# EAGLE board Shield1 (EAGLE 6.5.0)
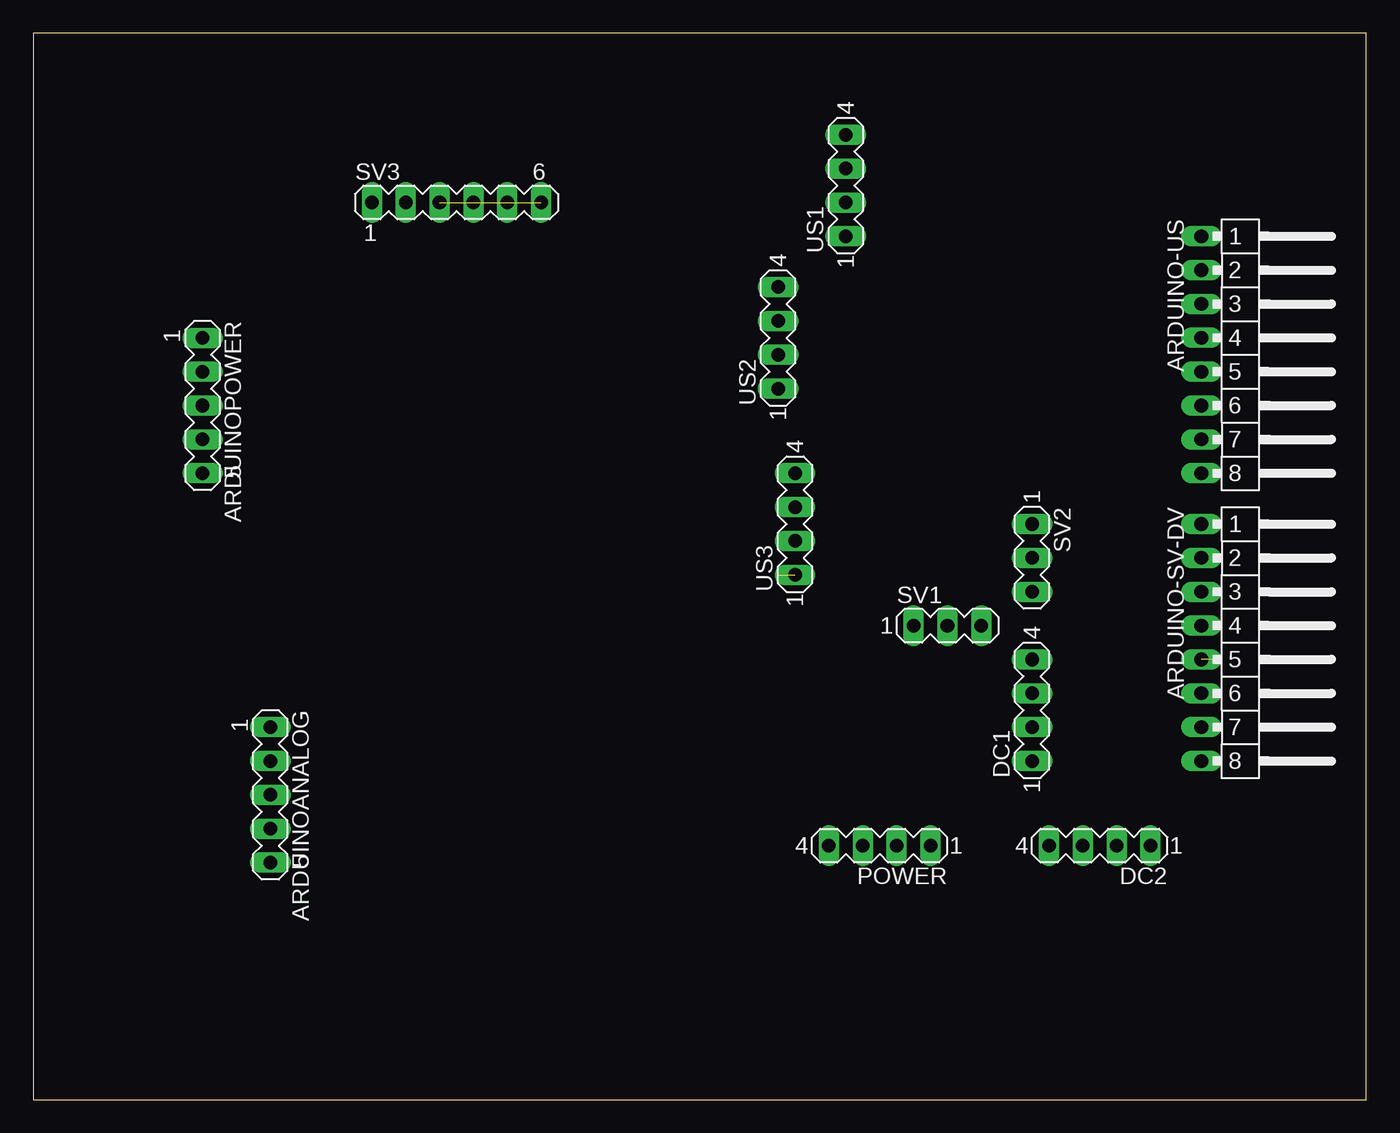
[diagram p0: board, top side]
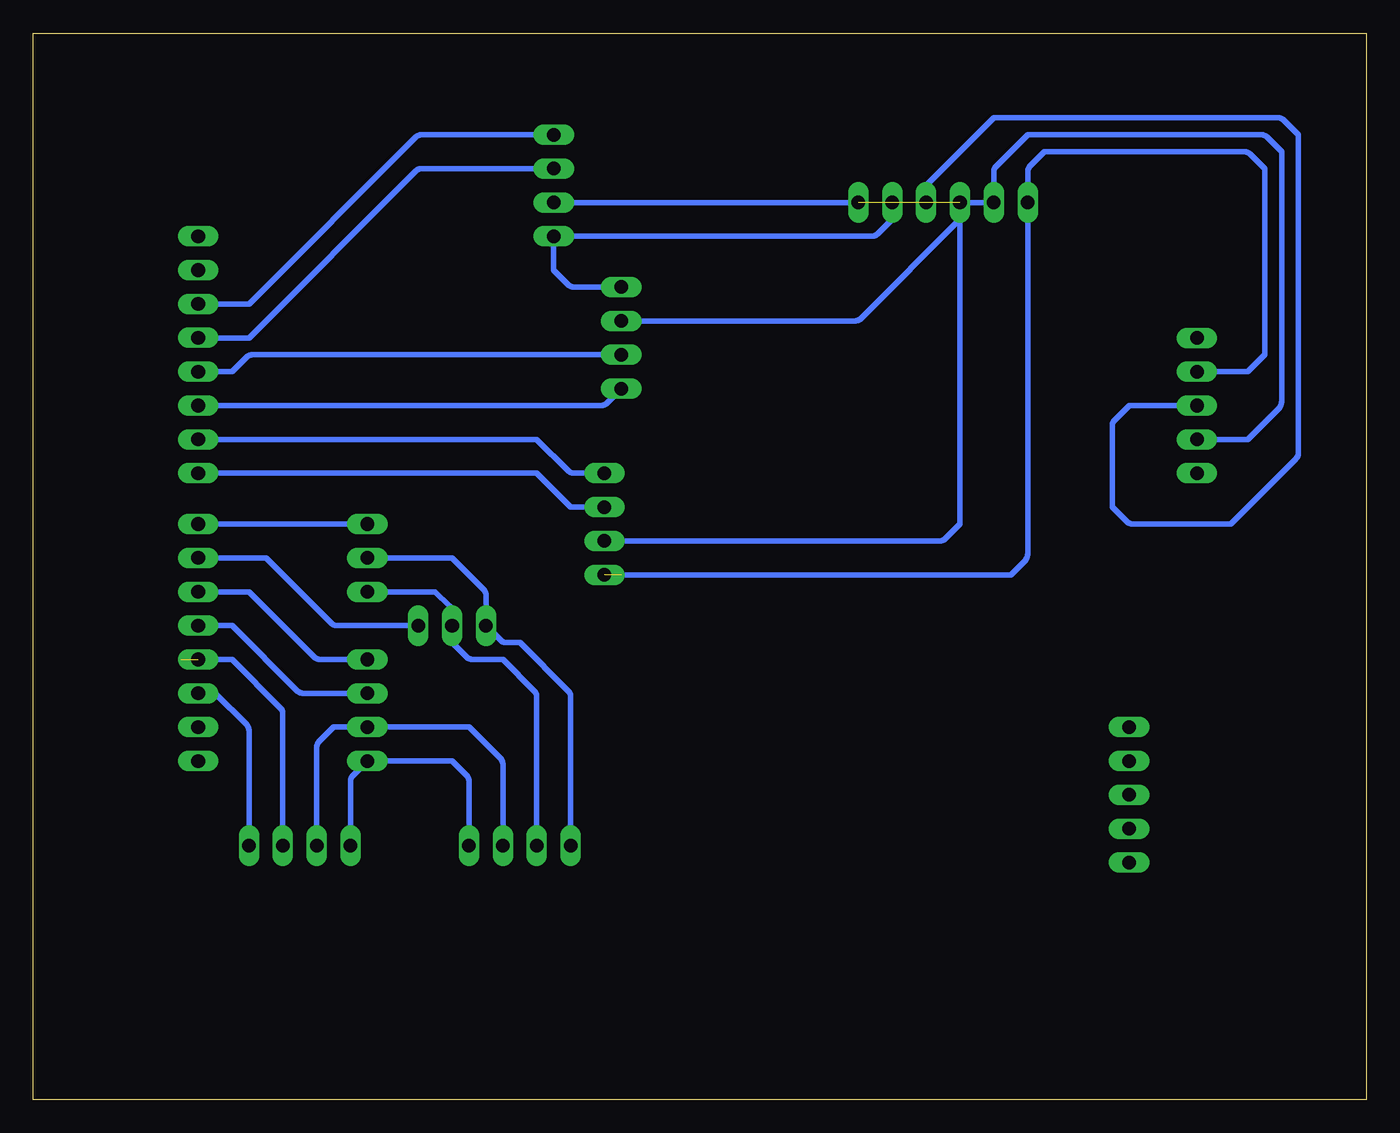
[diagram p1: board, bottom side, seen from below]

Size 100 x 80 mm. Coordinates in mm from the lower left corner, seen from the top.
Outline: 0,0 100,0 100,80 0,80 0,0
Copper layers (1*16): Top 0.035mm / dielectric 1.5mm / Bottom 0.035mm
Design rules "default": minimum track width 10mil, minimum drill 24mil, track to track 8mil, track to pad 8mil, pad to pad 8mil, via to via 8mil, smd to smd 8mil, copper to edge 40mil, drill to drill 8mil, minimum pad ring 10mil, minimum via ring 8mil, stop-mask expansion 4mil, vias tented up to drill 0mil, thermal gap 10mil

## Footprints (pad centres in the part's own frame; a part is rotated, then mirrored left to right if it is on the bottom)
MA08-1W = drill 1.016 long: 1 -8.89,0; 2 -6.35,0; 3 -3.81,0; 4 -1.27,0; 5 1.27,0; 6 3.81,0; 7 6.35,0; 8 8.89,0
MA05-1 = drill 1.016 long: 1 -5.08,0; 2 -2.54,0; 3 0,0; 4 2.54,0; 5 5.08,0
MA04-1 = drill 1.016 long: 1 -3.81,0; 2 -1.27,0; 3 1.27,0; 4 3.81,0
MA03-1 = drill 1.016 long: 1 -2.54,0; 2 0,0; 3 2.54,0
MA06-1 = drill 1.016 long: 1 -6.35,0; 2 -3.81,0; 3 -1.27,0; 4 1.27,0; 5 3.81,0; 6 6.35,0

## Placement (x,y rotation side)
ARDUINO-SV-DV  [MA08-1W]  87.63,34.29 270 top
ARDUINO-US  [MA08-1W]  87.63,55.88 270 top
ARDUINOANALOG  [MA05-1]  17.78,22.86 270 top
ARDUINOPOWER  [MA05-1]  12.7,52.07 270 top
DC1  [MA04-1]  74.93,29.21 90 top
DC2  [MA04-1]  80.01,19.05 180 top
POWER  [MA04-1]  63.5,19.05 180 top
SV1  [MA03-1]  68.58,35.56 0 top
SV2  [MA03-1]  74.93,40.64 270 top
SV3  [MA06-1]  31.75,67.31 0 top
US1  [MA04-1]  60.96,68.58 90 top
US2  [MA04-1]  55.88,57.15 90 top
US3  [MA04-1]  57.15,43.18 90 top

## Library data of the parts
ARDUINO-SV-DV ARDUINO-US ARDUINOANALOG ARDUINOPOWER DC1 DC2 POWER SV1-SV3 US1-US3 = con-lstb; OC_FARNELL: unknown; OC_NEWARK: unknown

## Nets
5V2: POWER.3 SV1.2 SV2.3
5V3: DC1.1 DC2.4 POWER.1
5VSS: ARDUINOPOWER.4 SV3.2 SV3.3 SV3.6 US1.2 US2.3 US3.2
GND2: POWER.4 SV1.1 SV2.2
GND3: DC1.2 DC2.3 POWER.2
GNDSS: ARDUINOPOWER.2 SV3.1 US3.1
SGN3: ARDUINO-SV-DV.3 DC1.4
SGN4: ARDUINO-SV-DV.4 DC1.3
SGN5: ARDUINO-SV-DV.5 DC2.2
SGN6: ARDUINO-SV-DV.6 DC2.1
SGNN2: ARDUINO-SV-DV.2 SV1.3
SIG1: ARDUINO-SV-DV.1 SV2.1
US1: ARDUINO-US.3 US1.4
US2: ARDUINO-US.4 US1.3
US3: ARDUINO-US.5 US2.2
US4: ARDUINO-US.6 US2.1
US5: ARDUINO-US.7 US3.4
US6: ARDUINO-US.8 US3.3
USGND: ARDUINOPOWER.3 SV3.4 SV3.5 US1.1 US2.4

## Tracks (layer width: path | path; a pad name or v marks a point on that pad's centre or on a via)
5V2
  Bottom 0.406: POWER.3 62.23,30.22 arc-45 62.42,30.67 64.77,33.02 67.05,33.02 arc45 67.5,33.21 68.58,34.29 SV1.2 68.58,36.57 arc-45 68.77,37.02 69.85,38.1 SV2.3
5V3
  Bottom 0.406: DC2.4 76.2,23.87 arc45 76.01,24.32 DC1.1 68.58,25.4 67.5,24.32 arc45 67.31,23.87 POWER.1
5VSS  (1 unrouted)
  Bottom 0.406: US1.2 SV3.6 | US2.3 38.36,58.42 arc-45 37.91,58.61 30.48,66.04 | 30.48,66.04 SV3.3 SV3.2 27.94,69.59 arc45 27.75,70.04 25.4,72.39 7.88,72.39 arc45 7.43,72.2 6.35,71.12 6.35,52.33 arc45 6.54,51.88 8.89,49.53 ARDUINOPOWER.4 | US3.2 32.01,41.91 arc-45 31.56,42.1 30.48,43.18 30.48,66.04
GND2
  Bottom 0.406: POWER.4 59.69,30.22 arc-45 59.88,30.67 63.5,34.29 64.51,34.29 arc45 64.96,34.48 SV1.1 66.04,37.84 arc-45 66.23,38.29 68.58,40.64 SV2.2
GND3
  Bottom 0.406: DC2.3 78.74,26.41 arc45 78.55,26.86 77.47,27.94 DC1.2 67.31,27.94 64.96,25.59 arc45 64.77,25.14 POWER.2
GNDSS  (1 unrouted)
  Bottom 0.406: ARDUINOPOWER.2 8.89,54.61 7.62,55.88 7.62,69.85 8.7,70.93 arc-45 9.15,71.12 24.13,71.12 25.21,70.04 arc-45 25.4,69.59 SV3.1 25.4,40.9 arc45 25.59,40.45 26.67,39.37 55.88,39.37
SGN3
  Bottom 0.406: DC1.4 78.48,33.02 arc45 78.93,33.21 83.82,38.1 ARDUINO-SV-DV.3
SGN4
  Bottom 0.406: DC1.3 79.75,30.48 arc45 80.2,30.67 85.09,35.56 ARDUINO-SV-DV.4
SGN5  (1 unrouted)
  Bottom 0.406: DC2.2 81.28,28.95 arc-45 81.47,29.4 85.09,33.02 88.9,33.02
SGN6
  Bottom 0.406: DC2.1 83.82,27.68 arc-45 84.01,28.13 86.36,30.48 ARDUINO-SV-DV.6
SGNN2
  Bottom 0.406: SV1.3 77.21,35.56 arc45 77.66,35.75 82.55,40.64 ARDUINO-SV-DV.2
SIG1
  Bottom 0.406: SV2.1 ARDUINO-SV-DV.1
US1
  Bottom 0.406: US1.4 70.86,72.39 arc-45 71.31,72.2 83.82,59.69 ARDUINO-US.3
US2
  Bottom 0.406: US1.3 70.86,69.85 arc-45 71.31,69.66 83.82,57.15 ARDUINO-US.4
US3
  Bottom 0.406: US2.2 83.56,55.88 arc-45 84.01,55.69 85.09,54.61 ARDUINO-US.5
US4
  Bottom 0.406: ARDUINO-US.6 57.41,52.07 arc-45 56.96,52.26 US2.1
US5
  Bottom 0.406: US3.4 59.43,46.99 arc45 59.88,47.18 62.23,49.53 ARDUINO-US.7
US6
  Bottom 0.406: ARDUINO-US.8 62.23,46.99 59.69,44.45 US3.3
USGND  (1 unrouted)
  Bottom 0.406: US2.4 59.43,60.96 arc45 59.88,61.15 60.96,62.23 US1.1 37.09,64.77 arc-45 36.64,64.96 35.56,66.04 SV3.5 | SV3.4 33.02,68.32 arc45 32.83,68.77 27.94,73.66 6.61,73.66 arc45 6.16,73.47 5.08,72.39 5.08,48.52 arc45 5.27,48.07 10.16,43.18 17.52,43.18 arc45 17.97,43.37 19.05,44.45 19.05,50.54 arc45 18.86,50.99 17.78,52.07 ARDUINOPOWER.3